# Altium PCB 电池连接板_测试.PcbDoc_2020-12-13_20-53-16.pcbdoc
Units mil, origin at the board's own origin, x right, y up, seen from the top; angles counter-clockwise.
Board outline 9930.79 x 4125 mil, 2 copper layers (Top Layer, Bottom Layer); 26 components, 47 nets, 96 pads, 5 vias.
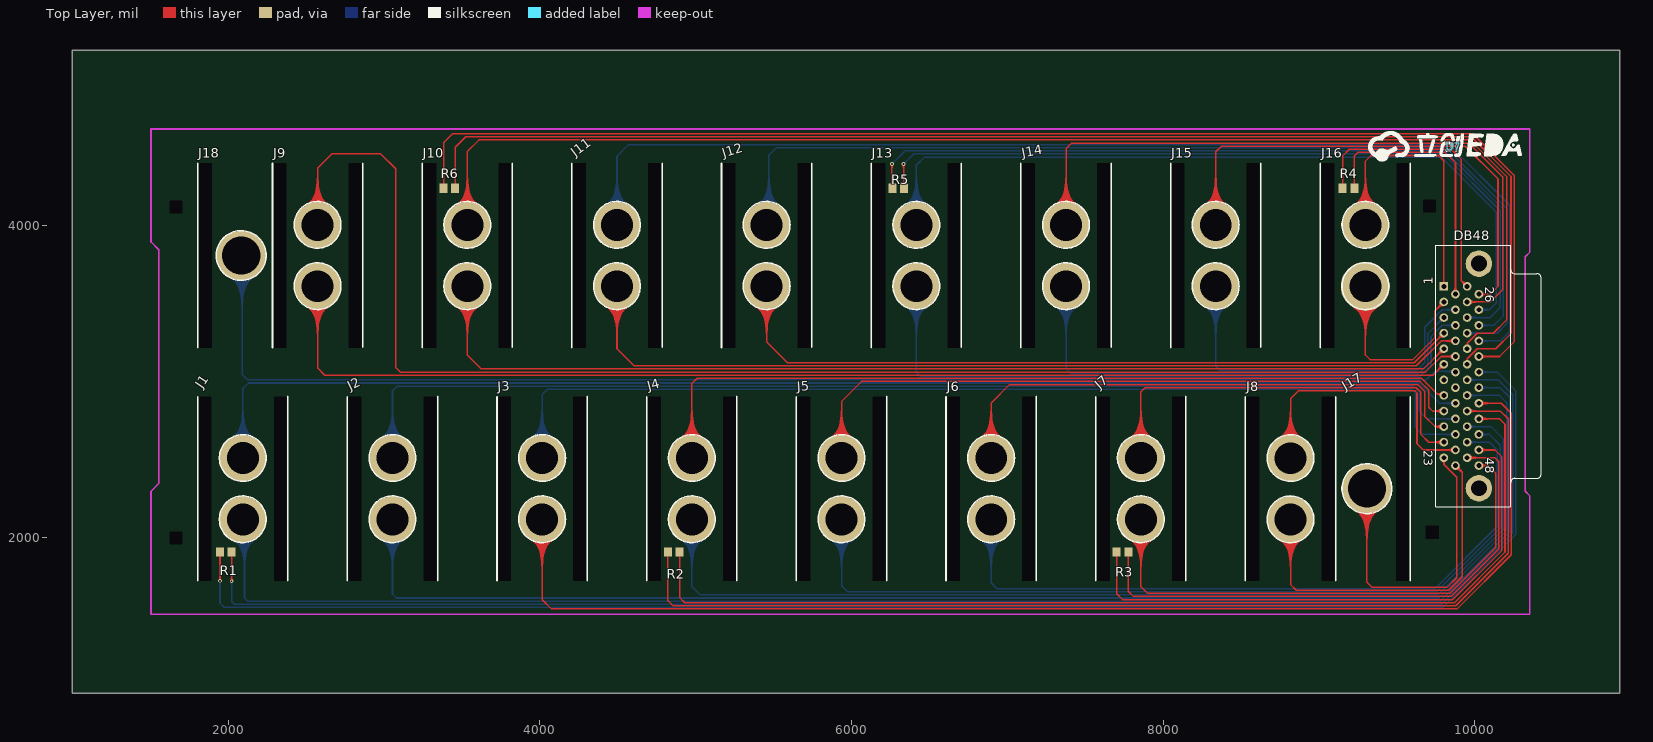
[diagram p0: Top Layer view]
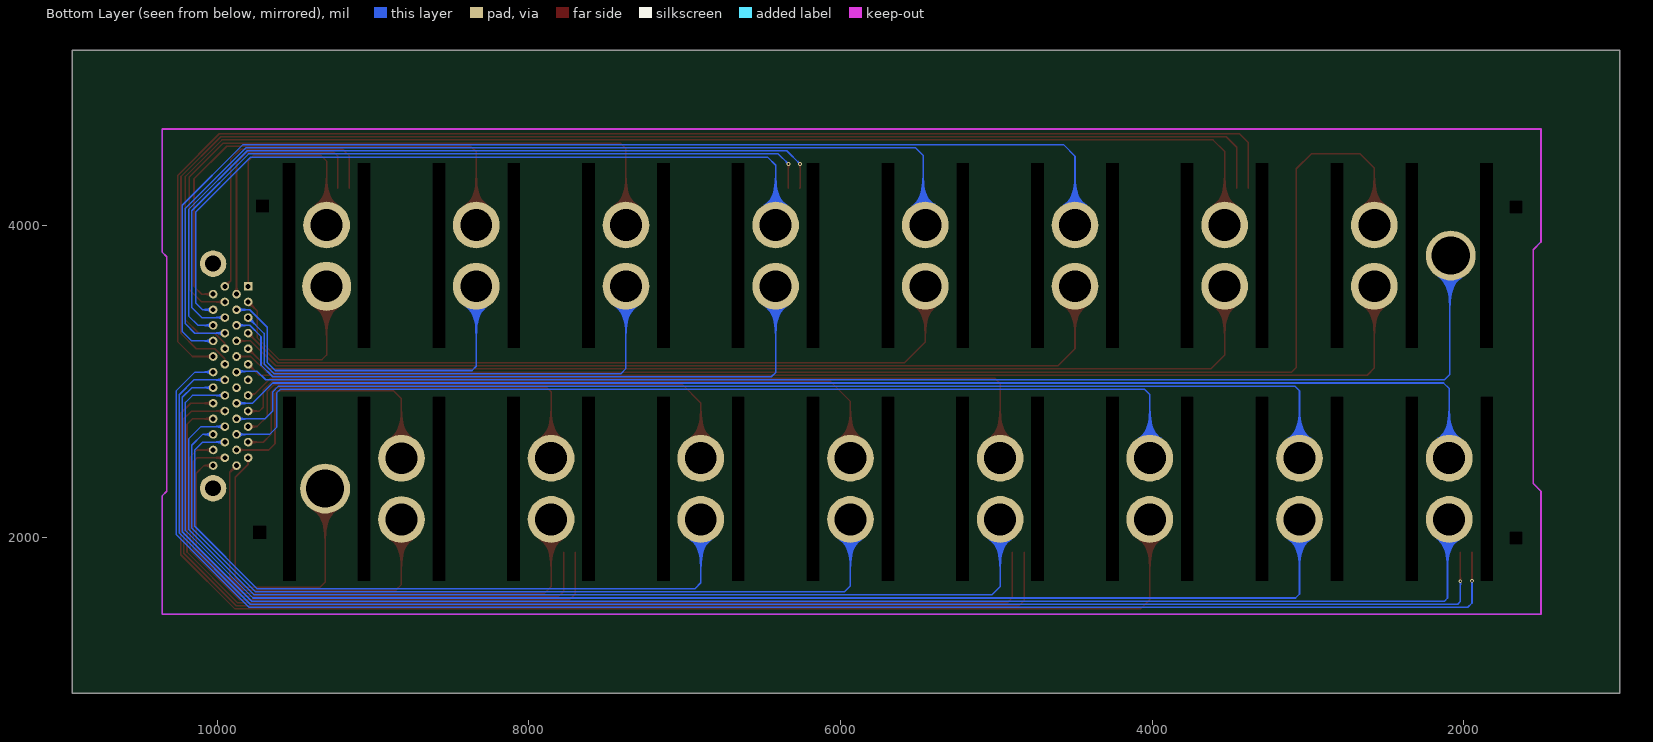
[diagram p1: Bottom Layer view, seen from below]

## Layer stack, top to bottom
Top Layer: signal copper (thickness not stored)
Dielectric: dielectric 12.6, FR-4, Dk 4.8
Bottom Layer: signal copper (thickness not stored)

## Board outline
10930.79,1000 1000,1000 1000,5125 10930.79,5125
cut-out: 1625,1955 1625,2035 1705,2035 1705,1955
cut-out: 1625,4160 1625,4080 1705,4080 1705,4160
cut-out: 9685,1990 9770,2075 9685,2075
cut-out: 9685,1990 9770,1990 9770,2075
cut-out: 9670,4165 9750,4165 9750,4085 9670,4085

## Components (designator, comment, footprint, x,y, rotation, side; value= is the part's Value field where it differs from the comment)
DB48 "Connector 48" 050DSUB1.27-2H48 10230,3035 r270 top
J1 "极耳" __ؼ___1#1 1804.21,1721.54 r0 top
J2 "极耳" __ؼ___1#1 2764.84,1721.54 r0 top
J3 "极耳" __ؼ___1#1 3725.47,1721.54 r0 top
J4 "极耳" __ؼ___1#1 4686.1,1721.54 r0 top
J5 "极耳" __ؼ___1#1 5646.73,1721.54 r0 top
J6 "极耳" __ؼ___1#1 6607.36,1721.54 r0 top
J7 "极耳" __ؼ___1#1 7567.99,1721.54 r0 top
J8 "极耳" __ؼ___1#1 8528.62,1720.98 r0 top
J9 "极耳" __ؼ___1#1 2284.53,3217.6 r0 top
J10 "极耳" __ؼ___1#1 3245.16,3217.6 r0 top
J11 "极耳" __ؼ___1#1 4205.79,3217.6 r0 top
J12 "极耳" __ؼ___1#1 5166.42,3217.6 r0 top
J13 "极耳" __ؼ___1#1 6127.05,3217.6 r0 top
J14 "极耳" __ؼ___1#1 7087.68,3217.6 r0 top
J15 "极耳" __ؼ___1#1 8048.31,3217.6 r0 top
J16 "极耳" __ؼ___1#2 9008.94,3217.6 r0 top
J17 "电池极耳2" __ؼ___2 9587.99,2902.09 r180 top
J18 "电池极耳2" __ؼ___2 1804.21,3217.6 r0 top
R1 "电阻" 0805 1985,1905 r0 top
R2 "电阻" 0805 4860,1905 r0 top
R3 "电阻" 0805 7740,1905 r0 top
R4 "电阻" 0805 9190,4240 r0 top
R5 "电阻" 0805 6300,4240 r0 top
R6 "电阻" 0805 3420,4240 r0 top
U7 "LOGO_立创EDA-LCEDA-TOP" LOGO_立创EDA-LCEDA-TOP 9865,4505 r0 top

## Footprints (in the part's own frame and the unit in brackets; to place one, negate y for a bottom-side part, rotate by r counter-clockwise, add the part's x,y. Pads: shape width x height; smd on the part's side, far side on the other; paste and mask are expansions set on the pad)
050DSUB1.27-2H48 [mm]
  rect 1.4x1.4 hole 0.8: 1(-14.605,-10.87)
  round 1.4 hole 0.8: 2(-13.335,-8.965) 3(-12.065,-10.87) 4(-10.795,-8.965) 5(-9.525,-10.87) 6(-8.255,-8.965) 7(-6.985,-10.87) 8(-5.715,-8.965) 9(-4.445,-10.87) 10(-3.175,-8.965) 11(-1.905,-10.87) 12(-0.635,-8.965) 13(0.635,-10.87) 14(1.905,-8.965) 15(3.175,-10.87) 16(4.445,-8.965) 17(5.715,-10.87) 18(6.985,-8.965) 19(8.255,-10.87) 20(9.525,-8.965) 21(10.795,-10.87) 22(12.065,-8.965) 23(13.335,-10.87) 24(14.605,-8.965) 25(-14.605,-7.06) 26(-13.335,-5.155) 27(-12.065,-7.06) 28(-10.795,-5.155) 29(-9.525,-7.06) 30(-8.255,-5.155) 31(-6.985,-7.06) 32(-5.715,-5.155) 33(-4.445,-7.06) 34(-3.175,-5.155) 35(-1.905,-7.06) 36(-0.635,-5.155) 37(0.635,-7.06) 38(1.905,-5.155) 39(3.175,-7.06) 40(4.445,-5.155) 41(5.715,-7.06) 42(6.985,-5.155) 43(8.255,-7.06) 44(9.525,-5.155) 45(10.795,-7.06) 46(12.065,-5.155) 47(13.335,-7.06) 48(14.605,-5.155)
  round 4.3 hole 2.6: 49(-18.305,-5.155) 50(18.305,-5.155)
  silkscreen extent -21.3,-12.17 21.31,5
0805 [mil]
  rect 51.18x59.06 smd: 1(-37.4,0) 2(37.4,0)
__ؼ___1#1 [mm]
  round 7.62 hole 5.2: 1(7.366,19.965) 2(7.366,9.982)
  Multi-Layer board cut-out: 0.254,30 0.254,0 2.286,0 2.258,0.028 2.258,30
  Multi-Layer board cut-out: 12.454,30 12.454,0 14.486,0 14.486,30
  silkscreen extent 0,0 14.71,30.01
__ؼ___1#2 [mm]
  round 7.62 hole 5.2: 1(7.366,19.964)
  round 8 hole 5.2: 2(7.366,9.982)
  Multi-Layer board cut-out: 0.254,30 0.254,0 2.286,0 2.258,0.028 2.258,30
  Multi-Layer board cut-out: 12.454,30 12.454,0 14.486,0 14.486,30
  silkscreen extent 0,0 14.71,30.01
__ؼ___2 [mil]
  round 320 hole 244.09: 5(280,590)
  Multi-Layer board cut-out: 10,1181.1 90,1181.1 90,0 10,0
  silkscreen extent 0,0 439,1181
LOGO_立创EDA-LCEDA-TOP [mil]
  silkscreen extent -549,-93 438,102

## Via types
v1: diameter 24.02, hole 12.01, Top Layer to Bottom Layer, 2 vias
v2: diameter 24.02, hole 12, Top Layer to Bottom Layer, 2 vias
v3: diameter 24, hole 12, Top Layer to Bottom Layer, 1 vias

## Nets (pads, with @x,y where several pads share a name; then routed paths per layer and width w, separated by ;. In a path a pad name is that pad's centre, name@x,y a point inside that pad or via, vN(x,y) a via of type N, cw(c..) or ccw(c..) an arc to the next point about the centre after c; other vN are vias at no path point)
GND: 
NETDB48_1: DB48.37 R1.2 | length 9957
  Top Layer w10: v2(2022.4,1717.6) R1.2
  Bottom Layer w10: v2(2022.4,1717.6) 2022.4,1587.6 2040,1570 9788.14,1570 10245,2026.86 10245,2915 10150,3010 DB48.37
NETDB48_2: DB48.36 R1.1 | length 10058.5
  Top Layer w10: v1(1947.6,1720.2) R1.1
  Bottom Layer w10: v1(1947.6,1720.2) 1947.6,1577.4 1975,1550 9796.42,1550 10265,2018.58 10265,2938.28 10143.28,3060 DB48.36
NETDB48_3: DB48.42 R2.2 | length 6740.6
  Top Layer w10: R2.2 4897.4,1612.6 4930,1580 9870,1580 10195,1905 10195,2725 10160,2760 DB48.42
NETDB48_4: DB48.41 R2.1 | length 7004.8
  Top Layer w10: R2.1 4822.6,1592.4 4855,1560 9878.28,1560 10215,1896.72 10215,2760 10165,2810 DB48.41
NETDB48_5: DB48.47 R3.2 | length 3543.1
  Top Layer w10: R3.2 7777.4,1652.6 7810,1620 9849.85,1620 10155,1925.15 10155,2485 10130,2510 DB48.47
NETDB48_6: DB48.46 R3.1 | length 3652.6
  Top Layer w10: R3.1 7702.6,1637.4 7740,1600 9860,1600 10175,1915 10175,2515 10130,2560 DB48.46
NETDB48_7: DB48.2 R4.2 | length 1737.1
  Top Layer w10: R4.2 9227.4,4447.4 9250,4470 9810,4470 9877.05,4402.95 DB48.2
NETDB48_8: DB48.25 R4.1 | length 1844.8
  Top Layer w10: R4.1 9152.6,4447.6 9195,4490 9850,4490 9915,4425 9915,3647.05 DB48.25
NETDB48_9: DB48.29 R5.2 | length 5024.2
  Top Layer w10: v1(6335,4395) 6335,4242.4 R5.2
  Bottom Layer w10: v1(6335,4395) 6400,4460 9800.35,4460 10165,4095.36 10165,3475 10100,3410 DB48.29
NETDB48_10: DB48.30 R5.1 | length 5138.6
  Top Layer w10: v2(6260,4395) 6260,4242.6 R5.1
  Bottom Layer w10: v2(6260,4395) 6345,4480 9808.64,4480 10185,4103.64 10185,3420 10125,3360 DB48.30
NETDB48_11: DB48.34 R6.1 | length 8632.9
  Top Layer w10: R6.1 3382.6,4532.6 3440,4590 9987.28,4590 10253.39,4323.89 10253.39,3253.39 10160,3160 DB48.34
NETDB48_12: DB48.35 R6.2 | length 8563.1
  Top Layer w10: R6.2 3457.4,4502.4 3525,4570 9979,4570 10233.39,4315.61 10233.39,3308.39 10135,3210 10016.86,3210 9952.05,3145.19 DB48.35
NETDB48_13: DB48.16 J1.1 | length 8298.2
  Bottom Layer w10: J1.1 2094.21,2954.21 2130,2990 9645,2990 9775,2860 DB48.16
NETDB48_14: DB48.38 J1.2 | length 9908.3
  Bottom Layer w10: J1.2 2105,2103.75 2105,1610 2125,1590 9779.85,1590 10225,2035.15 10225,2898.28 10163.28,2960 DB48.38
NETDB48_15: DB48.18 J2.1 | length 7425.5
  Bottom Layer w10: J2.1 3054.84,2939.84 3085,2970 9607.09,2970 9645,2932.09 9645,2810 9695,2760 DB48.18
NETDB48_16: DB48.39 J2.2 | length 8912.6
  Bottom Layer w10: J2.2 3054.84,1635.16 3080,1610 9771.57,1610 10205,2043.43 10205,2865 10160,2910 DB48.39
NETDB48_17: DB48.20 J3.1 | length 6532.8
  Bottom Layer w10: J3.1 4015.47,2915.47 4050,2950 9595,2950 9620,2925 9620,2705 9665,2660 DB48.20
NETDB48_18: DB48.40 J3.2 | length 8045
  Top Layer w10: J3.2 4015.47,1599.53 4075,1540 9886.57,1540 10235,1888.43 10235,2795 10170,2860 DB48.40
NETDB48_19: DB48.15 J4.1 | length 5364.1
  Top Layer w10: J4.1 4976.1,2986.1 5010,3020 9658.28,3020 9759.65,2918.63 9793.41,2918.63 DB48.15
NETDB48_20: DB48.43 J4.2 | length 6680.9
  Bottom Layer w10: J4.2 4976.1,1683.9 5030,1630 9763.28,1630 10185,2051.72 10185,2630 10105,2710 DB48.43
NETDB48_21: DB48.17 J5.1 | length 4425.8
  Top Layer w10: J5.1 5936.73,2871.73 6065,3000 9650,3000 9705,2945 9705,2835 9730,2810 DB48.17
NETDB48_22: DB48.44 J5.2 | length 5537.2
  Bottom Layer w10: J5.2 5936.73,1688.27 5975,1650 9755,1650 10165,2060 10165,2590 10095,2660 DB48.44
NETDB48_23: DB48.19 J6.1 | length 3513.8
  Top Layer w10: J6.1 6897.36,2862.36 7015,2980 9635,2980 9680,2935 9680,2775 9745,2710 DB48.19
NETDB48_24: DB48.45 J6.2 | length 4539.5
  Bottom Layer w10: J6.2 6897.36,1707.64 6935,1670 9745,1670 10145,2070 10145,2560 10095,2610 DB48.45
NETDB48_25: DB48.24 J8.2 | length 2301
  Top Layer w10: J8.2 8818.62,1696.38 8855,1660 9833.28,1660 9920,1746.72 9920,2417.05 DB48.24
NETDB48_26: DB48.22 J8.1 | length 1809.1
  Top Layer w10: J8.1 8818.62,2888.62 8870,2940 9615,2940 9630,2925 9630,2600 9670,2560 DB48.22
NETDB48_27: DB48.11 J9.2 | length 7800.5
  Top Layer w10: J9.2 2574.53,3085.47 2620,3040 9732.05,3040 DB48.11
NETDB48_28: DB48.10 J9.1 | length 9074.1
  Top Layer w10: J9.1 2574.53,4369.53 2665,4460 2980,4460 3075,4365 3075,3090 3105,3060 9685,3060 9785,3160 DB48.10
NETDB48_29: DB48.9 J10.2 | length 6798.7
  Top Layer w10: J10.2 3535.16,3169.84 3625,3080 9672.05,3080 DB48.9
NETDB48_30: DB48.33 J10.1 | length 8540.4
  Top Layer w10: J10.1 3535.16,4475.16 3610,4550 9970.71,4550 10205,4315.71 10205,3395 10120,3310 10016.86,3310 9952.05,3245.19 DB48.33
NETDB48_31: DB48.8 J11.2 | length 5894.2
  Top Layer w10: J11.2 4495.79,3209.21 4605,3100 9625,3100 9785,3260 DB48.8
NETDB48_32: DB48.32 J11.1 | length 7396.5
  Bottom Layer w10: v3(4495.79,4003.6) 4495.79,4445.79 4570,4520 9835,4520 10225,4130 10225,3320 10165,3260 DB48.32
NETDB48_33: DB48.7 J12.2 | length 4836.7
  Top Layer w10: J12.2 5456.42,3253.58 5590,3120 9612.05,3120 DB48.7
NETDB48_34: DB48.31 J12.1 | length 6388.2
  Bottom Layer w10: J12.1 5470,4017.18 5470,4450 5520,4500 9816.92,4500 10205,4111.92 10205,3370 10145,3310 DB48.31
NETDB48_35: DB48.6 J13.2 | length 4268.2
  Bottom Layer w10: J13.2 6417.05,3057.95 6445,3030 9645,3030 9720,3105 9720,3288.14 9791.86,3360 DB48.6
NETDB48_36: DB48.28 J13.1 | length 4987
  Bottom Layer w10: J13.1 6417.05,4387.05 6470,4440 9785,4440 10140,4085 10140,3505 10095,3460 DB48.28
NETDB48_37: DB48.5 J14.2 | length 3229.2
  Bottom Layer w10: J14.2 7377.68,3082.32 7410,3050 9636.72,3050 9700,3113.28 9700,3307.95 DB48.5
NETDB48_38: DB48.27 J14.1 | length 4380.5
  Top Layer w10: J14.1 7377.68,4492.68 7415,4530 9962.43,4530 10180,4312.43 10180,3590 10100,3510 DB48.27
NETDB48_39: DB48.4 J15.2 | length 2358
  Bottom Layer w10: J15.2 8338.31,3096.69 8365,3070 9628.43,3070 9680,3121.57 9680,3348.14 9791.86,3460 DB48.4
NETDB48_40: DB48.26 J15.1 | length 3217.2
  Top Layer w10: J15.1 8338.31,4473.31 8375,4510 9940,4510 10150,4300 10150,3610 10100,3560 DB48.26
NETDB48_41: DB48.3 J16.2 | length 1210.5
  Top Layer w10: J16.2 9298.94,3169.05 9327.99,3140 9603.76,3140 9745,3281.24 9745,3452.95 DB48.3
NETDB48_42: DB48.1 J16.1 | length 1748.4
  Top Layer w10: J16.1 9298.94,4413.94 9335,4450 9767.95,4450 9802.05,4415.91 DB48.1
NETDB48_43: DB48.48 J7.2 | length 3453.7
  Top Layer w10: J7.2 7857.99,1682.01 7900,1640 9841.57,1640 10135,1933.43 10135,2410 10085,2460 DB48.48
NETDB48_44: DB48.21 J7.1 | length 2683.8
  Top Layer w10: J7.1 7857.99,2932.99 7885,2960 9625,2960 9655,2930 9655,2660 9705,2610 DB48.21
NETDB48_47: DB48.12 J18.5 | length 8591.4
  Bottom Layer w10: J18.5 2090,3801.81 2090,3045 2125,3010 9690,3010 9745,3065 9872.05,3065 DB48.12
NETDB48_48: DB48.23 J17.5 | length 2019.6
  Top Layer w10: J17.5 9307.99,1712.01 9340,1680 9825,1680 9885,1740 9885,2385 9802.05,2467.95 DB48.23
pads on no net: DB48.13 DB48.14 DB48.49 DB48.50

## Polygon pours and split planes (outlines as drawn)
GND on Bottom Layer (solid): 1505,4620 1505,3895 1555,3845 1555,2345 1505,2295 1505,1505 10355,1505 10355,2265 10325,2295 10325,3800 10355,3830 10355,4620
GND on Top Layer (solid): 1505,4620 1505,3895 1555,3845 1555,2345 1505,2295 1505,1505 10355,1505 10355,2265 10325,2295 10325,3800 10355,3830 10355,4620

## Other copper
Top Layer:
  region net NETDB48_41: 9759.86,3474.88 9763.29,3478.44 9768.9,3485.04 9771.08,3488.09 9772.85,3490.98 9774.2,3493.69 9775.13,3496.24 9775.64,3498.61 9775.74,3500.82 9775.43,3502.87 9794.91,3483.38 9792.87,3483.7 9790.66,3483.6 9788.28,3483.08 9785.74,3482.15 9783.02,3480.8 9780.14,3479.04 9777.09,3476.85 9773.87,3474.26 9766.93,3467.81
  region net NETDB48_26: 9848.39,2565 9852.12,2565.02 9867.16,2566.02 9868.45,2566.33 9869.39,2566.68 9869.98,2567.08 9869.98,2552.92 9869.39,2553.32 9868.45,2553.67 9867.16,2553.98 9865.53,2554.25 9861.21,2554.67 9852.12,2554.98 9848.39,2555
  region net NETDB48_44: 9773.39,2615 9777.12,2615.02 9792.16,2616.02 9793.45,2616.33 9794.39,2616.68 9794.98,2617.08 9794.98,2602.92 9794.39,2603.32 9793.45,2603.67 9792.16,2603.98 9790.53,2604.25 9786.21,2604.67 9777.12,2604.98 9773.39,2605
  region net NETDB48_1: 2027.4,1740.52 2027.41,1738.25 2028.04,1728.68 2028.21,1728.23 2028.41,1728 2016.4,1728 2016.59,1728.23 2016.76,1728.68 2016.91,1729.37 2017.04,1730.28 2017.24,1732.79 2017.39,1738.25 2017.4,1740.52
  region net NETDB48_2: 1952.6,1743.12 1952.61,1740.85 1953.24,1731.28 1953.41,1730.83 1953.6,1730.6 1941.59,1730.6 1941.79,1730.83 1941.96,1731.28 1942.11,1731.97 1942.24,1732.88 1942.44,1735.38 1942.59,1740.85 1942.6,1743.12
  region net NETDB48_10: 6255,4372.07 6254.99,4374.35 6254.36,4383.91 6254.19,4384.37 6254,4384.6 6266,4384.6 6265.81,4384.37 6265.64,4383.91 6265.49,4383.23 6265.36,4382.32 6265.16,4379.81 6265.01,4374.35 6265,4372.07
  region net NETDB48_9: 6330,4372.07 6329.99,4374.35 6329.36,4383.91 6329.19,4384.37 6329,4384.6 6341,4384.6 6340.81,4384.37 6340.64,4383.91 6340.49,4383.23 6340.36,4382.32 6340.16,4379.81 6340.01,4374.35 6340,4372.07
  region net NETDB48_48: 9302.99,1992.16 9302.24,2018.83 9299.99,2043.6 9296.24,2066.47 9290.99,2087.45 9284.24,2106.53 9275.99,2123.72 9266.24,2139.01 9254.99,2152.41 9242.24,2163.91 9227.99,2173.52 9387.99,2173.52 9373.74,2163.91 9360.99,2152.41 9349.74,2139.01 9339.99,2123.72 9331.74,2106.53 9324.99,2087.45 9319.74,2066.47 9315.99,2043.6 9313.74,2018.83 9312.99,1992.16
  region net NETDB48_23: 6902.36,2807.45 6903.06,2782.42 6905.16,2759.18 6908.66,2737.72 6913.56,2718.04 6919.86,2700.15 6927.56,2684.04 6936.66,2669.71 6947.16,2657.17 6959.06,2646.41 6972.36,2637.44 6822.36,2637.44 6835.66,2646.41 6847.56,2657.17 6858.06,2669.71 6867.16,2684.04 6874.86,2700.15 6881.16,2718.04 6886.06,2737.72 6889.56,2759.18 6891.66,2782.42 6892.36,2807.45
  region net NETDB48_42: 9303.94,4303.52 9304.64,4278.49 9306.74,4255.24 9310.24,4233.78 9315.14,4214.11 9321.44,4196.21 9329.14,4180.1 9338.24,4165.78 9348.74,4153.24 9360.64,4142.48 9373.94,4133.5 9223.94,4133.5 9237.24,4142.48 9249.14,4153.24 9259.64,4165.78 9268.74,4180.1 9276.44,4196.21 9282.74,4214.11 9287.64,4233.78 9291.14,4255.24 9293.24,4278.49 9293.94,4303.52
  region net NETDB48_41: 9293.94,3295.72 9293.2,3321.97 9290.99,3346.35 9287.3,3368.87 9282.14,3389.52 9275.5,3408.3 9267.39,3425.22 9257.8,3440.27 9246.74,3453.45 9234.21,3464.77 9220.2,3474.22 9377.68,3474.22 9363.67,3464.77 9351.13,3453.45 9340.07,3440.27 9330.48,3425.22 9322.37,3408.3 9315.74,3389.52 9310.57,3368.87 9306.89,3346.35 9304.67,3321.97 9303.94,3295.72
  region net NETDB48_21: 5941.73,2807.45 5942.43,2782.42 5944.53,2759.18 5948.03,2737.72 5952.93,2718.04 5959.23,2700.15 5966.93,2684.04 5976.03,2669.71 5986.53,2657.17 5998.43,2646.41 6011.73,2637.44 5861.73,2637.44 5875.03,2646.41 5886.93,2657.17 5897.43,2669.71 5906.53,2684.04 5914.23,2700.15 5920.53,2718.04 5925.43,2737.72 5928.93,2759.18 5931.03,2782.42 5931.73,2807.45
  region net NETDB48_40: 8343.31,4303.52 8344.01,4278.49 8346.11,4255.24 8349.61,4233.78 8354.51,4214.11 8360.81,4196.21 8368.51,4180.1 8377.61,4165.78 8388.11,4153.24 8400.01,4142.48 8413.31,4133.5 8263.31,4133.5 8276.61,4142.48 8288.51,4153.24 8299.01,4165.78 8308.11,4180.1 8315.81,4196.21 8322.11,4214.11 8327.01,4233.78 8330.51,4255.24 8332.61,4278.49 8333.31,4303.52
  region net NETDB48_19: 4981.1,2807.45 4981.8,2782.42 4983.9,2759.18 4987.4,2737.72 4992.3,2718.04 4998.6,2700.15 5006.3,2684.04 5015.4,2669.71 5025.9,2657.17 5037.8,2646.41 5051.1,2637.44 4901.1,2637.44 4914.4,2646.41 4926.3,2657.17 4936.8,2669.71 4945.9,2684.04 4953.6,2700.15 4959.9,2718.04 4964.8,2737.72 4968.3,2759.18 4970.4,2782.42 4971.1,2807.45
  region net NETDB48_38: 7382.68,4303.52 7383.38,4278.49 7385.48,4255.24 7388.98,4233.78 7393.88,4214.11 7400.18,4196.21 7407.88,4180.1 7416.98,4165.78 7427.48,4153.24 7439.38,4142.48 7452.68,4133.5 7302.68,4133.5 7315.98,4142.48 7327.88,4153.24 7338.38,4165.78 7347.48,4180.1 7355.18,4196.21 7361.48,4214.11 7366.38,4233.78 7369.88,4255.24 7371.98,4278.49 7372.68,4303.52
  region net NETDB48_18: 4010.47,1814.62 4009.77,1839.65 4007.67,1862.89 4004.17,1884.35 3999.27,1904.03 3992.97,1921.92 3985.27,1938.03 3976.17,1952.36 3965.67,1964.9 3953.77,1975.66 3940.47,1984.63 4090.47,1984.63 4077.17,1975.66 4065.27,1964.9 4054.77,1952.36 4045.67,1938.03 4037.97,1921.92 4031.67,1904.03 4026.77,1884.35 4023.27,1862.89 4021.17,1839.65 4020.47,1814.62
  region net NETDB48_33: 5451.42,3310.68 5450.72,3335.71 5448.62,3358.95 5445.12,3380.41 5440.22,3400.09 5433.92,3417.98 5426.22,3434.09 5417.12,3448.42 5406.62,3460.96 5394.72,3471.72 5381.42,3480.69 5531.42,3480.69 5518.12,3471.72 5506.22,3460.96 5495.72,3448.42 5486.62,3434.09 5478.92,3417.98 5472.62,3400.09 5467.72,3380.41 5464.22,3358.95 5462.12,3335.71 5461.42,3310.68
  region net NETDB48_31: 4490.79,3310.68 4490.09,3335.71 4487.99,3358.95 4484.49,3380.41 4479.59,3400.09 4473.29,3417.98 4465.59,3434.09 4456.49,3448.42 4445.99,3460.96 4434.09,3471.72 4420.79,3480.69 4570.79,3480.69 4557.49,3471.72 4545.59,3460.96 4535.09,3448.42 4525.99,3434.09 4518.29,3417.98 4511.99,3400.09 4507.09,3380.41 4503.59,3358.95 4501.49,3335.71 4500.79,3310.68
  region net NETDB48_30: 3540.16,4303.52 3540.86,4278.49 3542.96,4255.24 3546.46,4233.78 3551.36,4214.11 3557.66,4196.21 3565.36,4180.1 3574.46,4165.78 3584.96,4153.24 3596.86,4142.48 3610.16,4133.5 3460.16,4133.5 3473.46,4142.48 3485.36,4153.24 3495.86,4165.78 3504.96,4180.1 3512.66,4196.21 3518.96,4214.11 3523.86,4233.78 3527.36,4255.24 3529.46,4278.49 3530.16,4303.52
  region net NETDB48_29: 3530.16,3310.68 3529.46,3335.71 3527.36,3358.95 3523.86,3380.41 3518.96,3400.09 3512.66,3417.98 3504.96,3434.09 3495.86,3448.42 3485.36,3460.96 3473.46,3471.72 3460.16,3480.69 3610.16,3480.69 3596.86,3471.72 3584.96,3460.96 3574.46,3448.42 3565.36,3434.09 3557.66,3417.98 3551.36,3400.09 3546.46,3380.41 3542.96,3358.95 3540.86,3335.71 3540.16,3310.68
  region net NETDB48_28: 2579.53,4303.52 2580.23,4278.49 2582.33,4255.24 2585.83,4233.78 2590.73,4214.11 2597.03,4196.21 2604.73,4180.1 2613.83,4165.78 2624.33,4153.24 2636.23,4142.48 2649.53,4133.5 2499.53,4133.5 2512.83,4142.48 2524.73,4153.24 2535.23,4165.78 2544.33,4180.1 2552.03,4196.21 2558.33,4214.11 2563.23,4233.78 2566.73,4255.24 2568.83,4278.49 2569.53,4303.52
  region net NETDB48_27: 2569.53,3310.68 2568.83,3335.71 2566.73,3358.95 2563.23,3380.41 2558.33,3400.09 2552.03,3417.98 2544.33,3434.09 2535.23,3448.42 2524.73,3460.96 2512.83,3471.72 2499.53,3480.69 2649.53,3480.69 2636.23,3471.72 2624.33,3460.96 2613.83,3448.42 2604.73,3434.09 2597.03,3417.98 2590.73,3400.09 2585.83,3380.41 2582.33,3358.95 2580.23,3335.71 2579.53,3310.68
  region net NETDB48_26: 8823.62,2806.9 8824.32,2781.87 8826.42,2758.63 8829.92,2737.17 8834.82,2717.49 8841.12,2699.6 8848.82,2683.49 8857.92,2669.16 8868.42,2656.62 8880.32,2645.86 8893.62,2636.89 8743.62,2636.89 8756.92,2645.86 8768.82,2656.62 8779.32,2669.16 8788.42,2683.49 8796.12,2699.6 8802.42,2717.49 8807.32,2737.17 8810.82,2758.63 8812.92,2781.87 8813.62,2806.9
  region net NETDB48_25: 8813.62,1814.07 8812.92,1839.1 8810.82,1862.34 8807.32,1883.8 8802.42,1903.48 8796.12,1921.37 8788.42,1937.48 8779.32,1951.8 8768.82,1964.35 8756.92,1975.11 8743.62,1984.08 8893.62,1984.08 8880.32,1975.11 8868.42,1964.35 8857.92,1951.8 8848.82,1937.48 8841.12,1921.37 8834.82,1903.48 8829.92,1883.8 8826.42,1862.34 8824.32,1839.1 8823.62,1814.07
  region net NETDB48_44: 7862.99,2807.45 7863.69,2782.42 7865.79,2759.18 7869.29,2737.72 7874.19,2718.04 7880.49,2700.15 7888.19,2684.04 7897.29,2669.71 7907.79,2657.17 7919.69,2646.41 7932.99,2637.44 7782.99,2637.44 7796.29,2646.41 7808.19,2657.17 7818.69,2669.71 7827.79,2684.04 7835.49,2700.15 7841.79,2718.04 7846.69,2737.72 7850.19,2759.18 7852.29,2782.42 7852.99,2807.45
  region net NETDB48_43: 7852.99,1814.62 7852.29,1839.65 7850.19,1862.89 7846.69,1884.35 7841.79,1904.03 7835.49,1921.92 7827.79,1938.03 7818.69,1952.36 7808.19,1964.9 7796.29,1975.66 7782.99,1984.63 7932.99,1984.63 7919.69,1975.66 7907.79,1964.9 7897.29,1952.36 7888.19,1938.03 7880.49,1921.92 7874.19,1904.03 7869.29,1884.35 7865.79,1862.89 7863.69,1839.65 7862.99,1814.62
  region net NETDB48_7: 9882.05,3614.66 9882.14,3609.72 9882.84,3601.08 9883.45,3597.39 9884.24,3594.1 9885.21,3591.23 9886.35,3588.77 9887.67,3586.72 9889.16,3585.09 9890.83,3583.87 9863.27,3583.87 9864.94,3585.09 9866.43,3586.72 9867.75,3588.77 9868.89,3591.23 9869.85,3594.1 9870.64,3597.39 9871.26,3601.08 9871.7,3605.2 9872.05,3614.66
  region net NETDB48_8: 9918.54,3650.58 9921.85,3647.38 9927.92,3642.14 9930.68,3640.12 9933.26,3638.48 9935.66,3637.24 9937.88,3636.38 9939.91,3635.92 9941.76,3635.85 9943.43,3636.18 9925.87,3618.62 9926.19,3620.29 9926.12,3622.14 9925.66,3624.17 9924.81,3626.39 9923.57,3628.79 9921.93,3631.37 9919.9,3634.13 9917.48,3637.07 9911.46,3643.51
  region net NETDB48_40: 10081.71,3555 10076.77,3554.91 10068.13,3554.21 10064.43,3553.6 10061.15,3552.8 10058.27,3551.84 10055.81,3550.7 10053.77,3549.38 10052.13,3547.89 10050.91,3546.22 10050.91,3573.78 10052.13,3572.11 10053.77,3570.62 10055.81,3569.3 10058.27,3568.16 10061.15,3567.19 10064.43,3566.4 10068.13,3565.79 10072.24,3565.35 10081.71,3565
  region net NETDB48_38: 10006.71,3505 10001.77,3504.91 9993.13,3504.21 9989.43,3503.6 9986.15,3502.8 9983.27,3501.84 9980.81,3500.7 9978.77,3499.38 9977.13,3497.89 9975.91,3496.22 9975.91,3523.78 9977.13,3522.11 9978.77,3520.62 9980.81,3519.3 9983.27,3518.16 9986.15,3517.19 9989.43,3516.4 9993.13,3515.79 9997.24,3515.35 10006.71,3515
  region net NETDB48_33: 9759.86,3274.88 9763.29,3278.44 9768.9,3285.04 9771.08,3288.09 9772.85,3290.98 9774.2,3293.69 9775.13,3296.24 9775.64,3298.61 9775.74,3300.82 9775.43,3302.87 9794.91,3283.38 9792.87,3283.7 9790.66,3283.6 9788.28,3283.08 9785.74,3282.15 9783.02,3280.8 9780.14,3279.04 9777.09,3276.85 9773.87,3274.26 9766.93,3267.81
  region net NETDB48_31: 9822.39,3265 9827.32,3265.09 9835.96,3265.79 9839.66,3266.4 9842.95,3267.19 9845.82,3268.16 9848.28,3269.3 9850.33,3270.62 9851.96,3272.11 9853.18,3273.78 9853.18,3246.22 9851.96,3247.89 9850.33,3249.38 9848.28,3250.7 9845.82,3251.84 9842.95,3252.8 9839.66,3253.6 9835.96,3254.21 9831.85,3254.65 9822.39,3255
  region net NETDB48_29: 9759.86,3174.88 9763.29,3178.44 9768.9,3185.04 9771.08,3188.09 9772.85,3190.98 9774.2,3193.69 9775.13,3196.24 9775.64,3198.61 9775.74,3200.82 9775.43,3202.87 9794.91,3183.38 9792.87,3183.7 9790.66,3183.6 9788.28,3183.08 9785.74,3182.15 9783.02,3180.8 9780.14,3179.04 9777.09,3176.85 9773.87,3174.26 9766.93,3167.81
  region net NETDB48_28: 9822.39,3165 9827.32,3165.09 9835.96,3165.79 9839.66,3166.4 9842.95,3167.19 9845.82,3168.16 9848.28,3169.3 9850.33,3170.62 9851.96,3172.11 9853.18,3173.78 9853.18,3146.22 9851.96,3147.89 9850.33,3149.38 9848.28,3150.7 9845.82,3151.84 9842.95,3152.81 9839.66,3153.6 9835.96,3154.21 9831.85,3154.65 9822.39,3155
  region net NETDB48_11: 10081.71,3155 10076.77,3154.91 10068.13,3154.21 10064.43,3153.6 10061.15,3152.8 10058.27,3151.84 10055.81,3150.7 10053.77,3149.38 10052.13,3147.89 10050.91,3146.22 10050.91,3173.78 10052.13,3172.11 10053.77,3170.62 10055.81,3169.3 10058.27,3168.16 10061.15,3167.19 10064.43,3166.4 10068.13,3165.79 10072.24,3165.35 10081.71,3165
  region net NETDB48_27: 9759.86,3074.88 9763.29,3078.44 9768.9,3085.04 9771.08,3088.09 9772.85,3090.98 9774.2,3093.69 9775.13,3096.24 9775.64,3098.61 9775.74,3100.82 9775.43,3102.87 9794.91,3083.38 9792.87,3083.7 9790.66,3083.6 9788.28,3083.08 9785.74,3082.15 9783.02,3080.8 9780.14,3079.04 9777.09,3076.85 9773.87,3074.26 9766.93,3067.81
  region net NETDB48_19: 9759.65,2923.63 9763.14,2923.66 9775.6,2924.47 9777.09,2924.77 9778.25,2925.12 9779.08,2925.51 9779.58,2925.95 9774.49,2910.55 9774.36,2911.13 9773.92,2911.66 9773.18,2912.12 9772.15,2912.52 9770.81,2912.86 9769.18,2913.14 9767.25,2913.36 9762.48,2913.6 9759.65,2913.63
  region net NETDB48_18: 10081.71,2855 10076.77,2854.91 10068.13,2854.21 10064.43,2853.6 10061.15,2852.8 10058.27,2851.84 10055.81,2850.7 10053.77,2849.38 10052.13,2847.89 10050.91,2846.22 10050.91,2873.78 10052.13,2872.11 10053.77,2870.62 10055.81,2869.3 10058.27,2868.16 10061.15,2867.19 10064.43,2866.4 10068.13,2865.79 10072.24,2865.35 10081.71,2865
  region net NETDB48_21: 9747.39,2815 9752.32,2815.09 9760.96,2815.79 9764.66,2816.4 9767.95,2817.19 9770.82,2818.16 9773.28,2819.3 9775.33,2820.62 9776.96,2822.11 9778.18,2823.78 9778.18,2796.22 9776.96,2797.89 9775.33,2799.38 9773.28,2800.7 9770.82,2801.84 9767.95,2802.8 9764.66,2803.6 9760.96,2804.21 9756.85,2804.65 9747.39,2805
  region net NETDB48_4: 10006.71,2805 10001.77,2804.91 9993.13,2804.21 9989.43,2803.6 9986.15,2802.8 9983.27,2801.84 9980.81,2800.7 9978.77,2799.38 9977.13,2797.89 9975.91,2796.22 9975.91,2823.78 9977.13,2822.11 9978.77,2820.62 9980.81,2819.3 9983.27,2818.16 9986.15,2817.19 9989.43,2816.4 9993.13,2815.79 9997.24,2815.35 10006.71,2815
  region net NETDB48_3: 10081.71,2755 10076.77,2754.91 10068.13,2754.21 10064.43,2753.6 10061.15,2752.8 10058.27,2751.84 10055.81,2750.7 10053.77,2749.38 10052.13,2747.89 10050.91,2746.22 10050.91,2773.78 10052.13,2772.11 10053.77,2770.62 10055.81,2769.3 10058.27,2768.16 10061.15,2767.19 10064.43,2766.4 10068.13,2765.79 10072.24,2765.35 10081.71,2765
  region net NETDB48_23: 9747.39,2715 9752.32,2715.09 9760.96,2715.79 9764.66,2716.4 9767.95,2717.19 9770.82,2718.16 9773.28,2719.3 9775.33,2720.62 9776.96,2722.11 9778.18,2723.78 9778.18,2696.22 9776.96,2697.89 9775.33,2699.38 9773.28,2700.7 9770.82,2701.84 9767.95,2702.8 9764.66,2703.6 9760.96,2704.21 9756.85,2704.65 9747.39,2705
  region net NETDB48_44: 9747.39,2615 9752.32,2615.09 9760.96,2615.79 9764.66,2616.4 9767.95,2617.19 9770.82,2618.16 9773.28,2619.3 9775.33,2620.62 9776.96,2622.11 9778.18,2623.78 9778.18,2596.22 9776.96,2597.89 9775.33,2599.38 9773.28,2600.7 9770.82,2601.84 9767.95,2602.81 9764.66,2603.6 9760.96,2604.21 9756.85,2604.65 9747.39,2605
  region net NETDB48_26: 9822.39,2565 9827.32,2565.09 9835.96,2565.79 9839.66,2566.4 9842.95,2567.19 9845.82,2568.16 9848.28,2569.3 9850.33,2570.62 9851.96,2572.11 9853.18,2573.78 9853.18,2546.22 9851.96,2547.89 9850.33,2549.38 9848.28,2550.7 9845.82,2551.84 9842.95,2552.81 9839.66,2553.6 9835.96,2554.21 9831.85,2554.65 9822.39,2555
  region net NETDB48_6: 10081.71,2555 10076.77,2554.91 10068.13,2554.21 10064.43,2553.6 10061.15,2552.8 10058.27,2551.84 10055.81,2550.7 10053.77,2549.38 10052.13,2547.89 10050.91,2546.22 10050.91,2573.78 10052.13,2572.11 10053.77,2570.62 10055.81,2569.3 10058.27,2568.16 10061.15,2567.19 10064.43,2566.4 10068.13,2565.79 10072.24,2565.35 10081.71,2565
  region net NETDB48_48: 9797.05,2467.95 9797.02,2470.78 9796.49,2479.24 9796.24,2480.64 9795.95,2481.76 9795.61,2482.6 9795.23,2483.15 9794.8,2483.41 9809.29,2483.41 9808.86,2483.15 9808.48,2482.6 9808.15,2481.76 9807.85,2480.64 9807.61,2479.24 9807.41,2477.55 9807.14,2473.32 9807.05,2467.95
  region net NETDB48_25: 9912.16,2417.81 9908.61,2421.24 9902,2426.85 9898.95,2429.04 9896.07,2430.8 9893.36,2432.15 9890.81,2433.08 9888.43,2433.6 9886.22,2433.7 9884.18,2433.38 9903.67,2452.87 9903.35,2450.82 9903.45,2448.61 9903.97,2446.24 9904.9,2443.69 9906.25,2440.98 9908.01,2438.09 9910.19,2435.04 9912.79,2431.82 9919.23,2424.88
  region net NETDB48_5: 10006.71,2505 10001.77,2504.91 9993.13,2504.21 9989.43,2503.6 9986.15,2502.8 9983.27,2501.84 9980.81,2500.7 9978.77,2499.38 9977.13,2497.89 9975.91,2496.22 9975.91,2523.78 9977.13,2522.11 9978.77,2520.62 9980.81,2519.3 9983.27,2518.16 9986.15,2517.19 9989.43,2516.4 9993.13,2515.79 9997.24,2515.35 10006.71,2515
  region net NETDB48_43: 10081.71,2455 10076.77,2454.91 10068.13,2454.21 10064.43,2453.6 10061.15,2452.81 10058.27,2451.84 10055.81,2450.7 10053.77,2449.38 10052.13,2447.89 10050.91,2446.22 10050.91,2473.78 10052.13,2472.11 10053.77,2470.62 10055.81,2469.3 10058.27,2468.16 10061.15,2467.19 10064.43,2466.4 10068.13,2465.79 10072.24,2465.35 10081.71,2465
Bottom Layer:
  region net NETDB48_1: 2017.4,1694.67 2017.39,1696.95 2016.76,1706.51 2016.59,1706.97 2016.4,1707.2 2028.41,1707.2 2028.21,1706.97 2028.04,1706.51 2027.89,1705.83 2027.76,1704.92 2027.56,1702.41 2027.41,1696.95 2027.4,1694.67
  region net NETDB48_2: 1942.6,1697.27 1942.59,1699.55 1941.96,1709.11 1941.79,1709.57 1941.59,1709.8 1953.6,1709.8 1953.41,1709.57 1953.24,1709.11 1953.09,1708.43 1952.96,1707.52 1952.76,1705.01 1952.61,1699.55 1952.6,1697.27
  region net NETDB48_10: 6279.75,4407.68 6278.14,4406.06 6271.83,4398.85 6271.63,4398.41 6271.6,4398.11 6263.11,4406.6 6263.41,4406.63 6263.85,4406.83 6264.44,4407.21 6265.18,4407.76 6267.09,4409.39 6271.06,4413.14 6272.68,4414.75
  region net NETDB48_9: 6354.75,4407.68 6353.14,4406.06 6346.83,4398.85 6346.63,4398.41 6346.6,4398.11 6338.11,4406.6 6338.41,4406.63 6338.85,4406.83 6339.44,4407.21 6340.18,4407.76 6342.09,4409.39 6346.06,4413.14 6347.68,4414.75
  region net NETDB48_47: 2085,3487.6 2084.24,3514.32 2081.97,3539.06 2078.18,3561.84 2072.88,3582.66 2066.07,3601.5 2057.74,3618.38 2047.9,3633.3 2036.54,3646.24 2023.66,3657.22 2009.28,3666.23 2169.17,3672.02 2155.08,3661.81 2142.47,3649.78 2131.34,3635.93 2121.7,3620.26 2113.54,3602.76 2106.87,3583.45 2101.68,3562.31 2097.97,3539.35 2095.74,3514.57 2095,3487.96
  region net NETDB48_24: 6892.36,1814.62 6891.66,1839.65 6889.56,1862.89 6886.06,1884.35 6881.16,1904.03 6874.86,1921.92 6867.16,1938.03 6858.06,1952.36 6847.56,1964.9 6835.66,1975.66 6822.36,1984.63 6972.36,1984.63 6959.06,1975.66 6947.16,1964.9 6936.66,1952.36 6927.56,1938.03 6919.86,1921.92 6913.56,1904.03 6908.66,1884.35 6905.16,1862.89 6903.06,1839.65 6902.36,1814.62
  region net NETDB48_22: 5931.73,1814.62 5931.03,1839.65 5928.93,1862.89 5925.43,1884.35 5920.53,1904.03 5914.23,1921.92 5906.53,1938.03 5897.43,1952.36 5886.93,1964.9 5875.03,1975.66 5861.73,1984.63 6011.73,1984.63 5998.43,1975.66 5986.53,1964.9 5976.03,1952.36 5966.93,1938.03 5959.23,1921.92 5952.93,1904.03 5948.03,1884.35 5944.53,1862.89 5942.43,1839.65 5941.73,1814.62
  region net NETDB48_39: 8333.31,3310.68 8332.61,3335.71 8330.51,3358.95 8327.01,3380.41 8322.11,3400.09 8315.81,3417.98 8308.11,3434.09 8299.01,3448.42 8288.51,3460.96 8276.61,3471.72 8263.31,3480.69 8413.31,3480.69 8400.01,3471.72 8388.11,3460.96 8377.61,3448.42 8368.51,3434.09 8360.81,3417.98 8354.51,3400.09 8349.61,3380.41 8346.11,3358.95 8344.01,3335.71 8343.31,3310.68
  region net NETDB48_20: 4971.1,1814.62 4970.4,1839.65 4968.3,1862.89 4964.8,1884.35 4959.9,1904.03 4953.6,1921.92 4945.9,1938.03 4936.8,1952.36 4926.3,1964.9 4914.4,1975.66 4901.1,1984.63 5051.1,1984.63 5037.8,1975.66 5025.9,1964.9 5015.4,1952.36 5006.3,1938.03 4998.6,1921.92 4992.3,1904.03 4987.4,1884.35 4983.9,1862.89 4981.8,1839.65 4981.1,1814.62
  region net NETDB48_37: 7372.68,3310.68 7371.98,3335.71 7369.88,3358.95 7366.38,3380.41 7361.48,3400.09 7355.18,3417.98 7347.48,3434.09 7338.38,3448.42 7327.88,3460.96 7315.98,3471.72 7302.68,3480.69 7452.68,3480.69 7439.38,3471.72 7427.48,3460.96 7416.98,3448.42 7407.88,3434.09 7400.18,3417.98 7393.88,3400.09 7388.98,3380.41 7385.48,3358.95 7383.38,3335.71 7382.68,3310.68
  region net NETDB48_17: 4020.47,2807.45 4021.17,2782.42 4023.27,2759.18 4026.77,2737.72 4031.67,2718.04 4037.97,2700.15 4045.67,2684.04 4054.77,2669.71 4065.27,2657.17 4077.17,2646.41 4090.47,2637.44 3940.47,2637.44 3953.77,2646.41 3965.67,2657.17 3976.17,2669.71 3985.27,2684.04 3992.97,2700.15 3999.27,2718.04 4004.17,2737.72 4007.67,2759.18 4009.77,2782.42 4010.47,2807.45
  region net NETDB48_36: 6422.05,4303.52 6422.75,4278.49 6424.85,4255.24 6428.35,4233.78 6433.25,4214.11 6439.55,4196.21 6447.25,4180.1 6456.35,4165.78 6466.85,4153.24 6478.75,4142.48 6492.05,4133.5 6342.05,4133.5 6355.35,4142.48 6367.25,4153.24 6377.75,4165.78 6386.85,4180.1 6394.55,4196.21 6400.85,4214.11 6405.75,4233.78 6409.25,4255.24 6411.35,4278.49 6412.05,4303.52
  region net NETDB48_35: 6412.05,3310.68 6411.35,3335.71 6409.25,3358.95 6405.75,3380.41 6400.85,3400.09 6394.55,3417.98 6386.85,3434.09 6377.75,3448.42 6367.25,3460.96 6355.35,3471.72 6342.05,3480.69 6492.05,3480.69 6478.75,3471.72 6466.85,3460.96 6456.35,3448.42 6447.25,3434.09 6439.55,3417.98 6433.25,3400.09 6428.35,3380.41 6424.85,3358.95 6422.75,3335.71 6422.05,3310.68
  region net NETDB48_15: 3059.84,2807.45 3060.54,2782.42 3062.64,2759.18 3066.14,2737.72 3071.04,2718.04 3077.34,2700.15 3085.04,2684.04 3094.14,2669.71 3104.64,2657.17 3116.54,2646.41 3129.84,2637.44 2979.84,2637.44 2993.14,2646.41 3005.04,2657.17 3015.54,2669.71 3024.64,2684.04 3032.34,2700.15 3038.64,2718.04 3043.54,2737.72 3047.04,2759.18 3049.14,2782.42 3049.84,2807.45
  region net NETDB48_16: 3049.84,1814.62 3049.14,1839.65 3047.04,1862.89 3043.54,1884.35 3038.64,1904.03 3032.34,1921.92 3024.64,1938.03 3015.54,1952.36 3005.04,1964.9 2993.14,1975.66 2979.84,1984.63 3129.84,1984.63 3116.54,1975.66 3104.64,1964.9 3094.14,1952.36 3085.04,1938.03 3077.34,1921.92 3071.04,1904.03 3066.14,1884.35 3062.64,1862.89 3060.54,1839.65 3059.84,1814.62
  region net NETDB48_34: 5475,4302.44 5475.68,4277.57 5477.71,4254.31 5481.11,4232.65 5485.86,4212.61 5491.97,4194.18 5499.43,4177.36 5508.26,4162.15 5518.44,4148.55 5529.98,4136.56 5542.87,4126.18 5393.49,4139.76 5407.08,4147.34 5419.23,4156.88 5429.96,4168.36 5439.26,4181.8 5447.12,4197.18 5453.56,4214.52 5458.56,4233.8 5462.14,4255.04 5464.28,4278.22 5465,4303.35
  region net NETDB48_13: 2099.21,2807.45 2099.91,2782.42 2102.01,2759.18 2105.51,2737.72 2110.41,2718.04 2116.71,2700.15 2124.41,2684.04 2133.51,2669.71 2144.01,2657.17 2155.91,2646.41 2169.21,2637.44 2019.21,2637.44 2032.51,2646.41 2044.41,2657.17 2054.91,2669.71 2064.01,2684.04 2071.71,2700.15 2078.01,2718.04 2082.91,2737.72 2086.41,2759.18 2088.51,2782.42 2089.21,2807.45
  region net NETDB48_14: 2100,1814.65 2099.29,1839.76 2097.15,1862.96 2093.59,1884.24 2088.6,1903.61 2082.19,1921.06 2074.35,1936.6 2065.09,1950.22 2054.4,1961.92 2042.29,1971.7 2028.75,1979.57 2178.36,1990.36 2165.37,1980.27 2153.75,1968.54 2143.5,1955.16 2134.61,1940.13 2127.09,1923.45 2120.94,1905.13 2116.15,1885.16 2112.73,1863.54 2110.68,1840.28 2110,1815.37
  region net NETDB48_32: 4500.79,4303.52 4501.49,4278.49 4503.59,4255.24 4507.09,4233.78 4511.99,4214.11 4518.29,4196.21 4525.99,4180.1 4535.09,4165.78 4545.59,4153.24 4557.49,4142.48 4570.79,4133.5 4420.79,4133.5 4434.09,4142.48 4445.99,4153.24 4456.49,4165.78 4465.59,4180.1 4473.29,4196.21 4479.59,4214.11 4484.49,4233.78 4487.99,4255.24 4490.09,4278.49 4490.79,4303.52
  region net NETDB48_39: 9822.39,3465 9827.32,3465.09 9835.96,3465.79 9839.66,3466.4 9842.95,3467.19 9845.82,3468.16 9848.28,3469.3 9850.33,3470.62 9851.96,3472.11 9853.18,3473.78 9853.18,3446.22 9851.96,3447.89 9850.33,3449.38 9848.28,3450.7 9845.82,3451.84 9842.95,3452.8 9839.66,3453.6 9835.96,3454.21 9831.85,3454.65 9822.39,3455
  region net NETDB48_36: 10081.71,3455 10076.77,3454.91 10068.13,3454.21 10064.43,3453.6 10061.15,3452.8 10058.27,3451.84 10055.81,3450.7 10053.77,3449.38 10052.13,3447.89 10050.91,3446.22 10050.91,3473.78 10052.13,3472.11 10053.77,3470.62 10055.81,3469.3 10058.27,3468.16 10061.15,3467.19 10064.43,3466.4 10068.13,3465.79 10072.24,3465.35 10081.71,3465
  region net NETDB48_37: 9759.86,3374.88 9763.29,3378.44 9768.9,3385.04 9771.08,3388.09 9772.85,3390.98 9774.2,3393.69 9775.13,3396.24 9775.64,3398.61 9775.74,3400.82 9775.43,3402.87 9794.91,3383.38 9792.87,3383.7 9790.66,3383.6 9788.28,3383.08 9785.74,3382.15 9783.02,3380.8 9780.14,3379.04 9777.09,3376.85 9773.87,3374.26 9766.93,3367.81
  region net NETDB48_35: 9822.39,3365 9827.32,3365.09 9835.96,3365.79 9839.66,3366.4 9842.95,3367.19 9845.82,3368.16 9848.28,3369.3 9850.33,3370.62 9851.96,3372.11 9853.18,3373.78 9853.18,3346.22 9851.96,3347.89 9850.33,3349.38 9848.28,3350.7 9845.82,3351.84 9842.95,3352.8 9839.66,3353.6 9835.96,3354.21 9831.85,3354.65 9822.39,3355
  region net NETDB48_9: 10006.71,3405 10001.77,3404.91 9993.13,3404.21 9989.43,3403.6 9986.15,3402.8 9983.27,3401.84 9980.81,3400.7 9978.77,3399.38 9977.13,3397.89 9975.91,3396.22 9975.91,3423.78 9977.13,3422.11 9978.77,3420.62 9980.81,3419.3 9983.27,3418.16 9986.15,3417.19 9989.43,3416.4 9993.13,3415.79 9997.24,3415.35 10006.71,3415
  region net NETDB48_10: 10081.71,3355 10076.77,3354.91 10068.13,3354.21 10064.43,3353.6 10061.15,3352.8 10058.27,3351.84 10055.81,3350.7 10053.77,3349.38 10052.13,3347.89 10050.91,3346.22 10050.91,3373.78 10052.13,3372.11 10053.77,3370.62 10055.81,3369.3 10058.27,3368.16 10061.15,3367.19 10064.43,3366.4 10068.13,3365.79 10072.24,3365.35 10081.71,3365
  region net NETDB48_34: 10006.71,3305 10001.77,3304.91 9993.13,3304.21 9989.43,3303.6 9986.15,3302.8 9983.27,3301.84 9980.81,3300.7 9978.77,3299.38 9977.13,3297.89 9975.91,3296.22 9975.91,3323.78 9977.13,3322.11 9978.77,3320.62 9980.81,3319.3 9983.27,3318.16 9986.15,3317.19 9989.43,3316.4 9993.13,3315.79 9997.24,3315.35 10006.71,3315
  region net NETDB48_32: 10081.71,3255 10076.77,3254.91 10068.13,3254.21 10064.43,3253.6 10061.15,3252.8 10058.27,3251.84 10055.81,3250.7 10053.77,3249.38 10052.13,3247.89 10050.91,3246.22 10050.91,3273.78 10052.13,3272.11 10053.77,3270.62 10055.81,3269.3 10058.27,3268.16 10061.15,3267.19 10064.43,3266.4 10068.13,3265.79 10072.24,3265.35 10081.71,3265
  region net NETDB48_47: 9823.81,3070 9828.73,3070.08 9837.44,3070.71 9841.23,3071.26 9844.65,3071.97 9847.69,3072.84 9850.35,3073.86 9852.64,3075.04 9854.54,3076.38 9856.08,3077.88 9851.08,3050.78 9850.2,3052.53 9848.86,3054.1 9847.08,3055.48 9844.84,3056.68 9842.15,3057.69 9839.01,3058.52 9835.42,3059.17 9831.37,3059.63 9821.93,3060
  region net NETDB48_2: 10081.71,3055 10076.77,3054.91 10068.13,3054.21 10064.43,3053.6 10061.15,3052.8 10058.27,3051.84 10055.81,3050.7 10053.77,3049.38 10052.13,3047.89 10050.91,3046.22 10050.91,3073.78 10052.13,3072.11 10053.77,3070.62 10055.81,3069.3 10058.27,3068.16 10061.15,3067.19 10064.43,3066.4 10068.13,3065.79 10072.24,3065.35 10081.71,3065
  region net NETDB48_1: 10006.71,3005 10001.77,3004.91 9993.13,3004.21 9989.43,3003.6 9986.15,3002.8 9983.27,3001.84 9980.81,3000.7 9978.77,2999.38 9977.13,2997.89 9975.91,2996.22 9975.91,3023.78 9977.13,3022.11 9978.77,3020.62 9980.81,3019.3 9983.27,3018.16 9986.15,3017.19 9989.43,3016.4 9993.13,3015.79 9997.24,3015.35 10006.71,3015
  region net NETDB48_14: 10081.71,2955 10076.77,2954.91 10068.13,2954.21 10064.43,2953.6 10061.15,2952.8 10058.27,2951.84 10055.81,2950.7 10053.77,2949.38 10052.13,2947.89 10050.91,2946.22 10050.91,2973.78 10052.13,2972.11 10053.77,2970.62 10055.81,2969.3 10058.27,2968.16 10061.15,2967.19 10064.43,2966.4 10068.13,2965.79 10072.24,2965.35 10081.71,2965
  region net NETDB48_13: 9822.39,2865 9827.32,2865.09 9835.96,2865.79 9839.66,2866.4 9842.95,2867.19 9845.82,2868.16 9848.28,2869.3 9850.33,2870.62 9851.96,2872.11 9853.18,2873.78 9853.18,2846.22 9851.96,2847.89 9850.33,2849.38 9848.28,2850.7 9845.82,2851.84 9842.95,2852.81 9839.66,2853.6 9835.96,2854.21 9831.85,2854.65 9822.39,2855
  region net NETDB48_16: 10006.71,2905 10001.77,2904.91 9993.13,2904.21 9989.43,2903.6 9986.15,2902.8 9983.27,2901.84 9980.81,2900.7 9978.77,2899.38 9977.13,2897.89 9975.91,2896.22 9975.91,2923.78 9977.13,2922.11 9978.77,2920.62 9980.81,2919.3 9983.27,2918.16 9986.15,2917.19 9989.43,2916.4 9993.13,2915.79 9997.24,2915.35 10006.71,2915
  region net NETDB48_15: 9822.39,2765 9827.32,2765.09 9835.96,2765.79 9839.66,2766.4 9842.95,2767.19 9845.82,2768.16 9848.28,2769.3 9850.33,2770.62 9851.96,2772.11 9853.18,2773.78 9853.18,2746.22 9851.96,2747.89 9850.33,2749.38 9848.28,2750.7 9845.82,2751.84 9842.95,2752.81 9839.66,2753.6 9835.96,2754.21 9831.85,2754.65 9822.39,2755
  region net NETDB48_17: 9822.39,2665 9827.32,2665.09 9835.96,2665.79 9839.66,2666.4 9842.95,2667.19 9845.82,2668.16 9848.28,2669.3 9850.33,2670.62 9851.96,2672.11 9853.18,2673.78 9853.18,2646.22 9851.96,2647.89 9850.33,2649.38 9848.28,2650.7 9845.82,2651.84 9842.95,2652.81 9839.66,2653.6 9835.96,2654.21 9831.85,2654.65 9822.39,2655
  region net NETDB48_20: 10006.71,2705 10001.77,2704.91 9993.13,2704.21 9989.43,2703.6 9986.15,2702.8 9983.27,2701.84 9980.81,2700.7 9978.77,2699.38 9977.13,2697.89 9975.91,2696.22 9975.91,2723.78 9977.13,2722.11 9978.77,2720.62 9980.81,2719.3 9983.27,2718.16 9986.15,2717.19 9989.43,2716.4 9993.13,2715.79 9997.24,2715.35 10006.71,2715
  region net NETDB48_22: 10081.71,2655 10076.77,2654.91 10068.13,2654.21 10064.43,2653.6 10061.15,2652.8 10058.27,2651.84 10055.81,2650.7 10053.77,2649.38 10052.13,2647.89 10050.91,2646.22 10050.91,2673.78 10052.13,2672.11 10053.77,2670.62 10055.81,2669.3 10058.27,2668.16 10061.15,2667.19 10064.43,2666.4 10068.13,2665.79 10072.24,2665.35 10081.71,2665
  region net NETDB48_24: 10006.71,2605 10001.77,2604.91 9993.13,2604.21 9989.43,2603.6 9986.15,2602.8 9983.27,2601.84 9980.81,2600.7 9978.77,2599.38 9977.13,2597.89 9975.91,2596.22 9975.91,2623.78 9977.13,2622.11 9978.77,2620.62 9980.81,2619.3 9983.27,2618.16 9986.15,2617.19 9989.43,2616.4 9993.13,2615.79 9997.24,2615.35 10006.71,2615

## Silkscreen, mask and mechanical layers (free items; w line width, h text height)
Mechanical 1:
  lines w10: 1505,1505 10355,1505 10355,2265 10325,2295 10325,3800 10355,3830 10355,4620 1515,4620 1505,4620 1505,3895 1555,3845 1555,2345 1505,2295 1505,1505
Document:
  lines w0.1: 5964.39,3061.5 5966.39,3063.5

## Text inside footprints (layer, text, board x,y; h text height)
DB48: Top Overlay "26" at 10069.37,3609.21 h59.06 r270; Top Overlay "48" at 10069.37,2509.21 h59.06 r270; Top Overlay "1" at 9732.17,3619.84 h59.06 r90; Top Overlay "23" at 9673.11,2559.21 h59.06 r270